# Altium PCB Copy of Receiver.PcbDoc (part 2 of 4)
Units mil, origin at the board's own origin, x right, y up, seen from the top; angles counter-clockwise.
Board outline 6370 x 5700 mil, 4 copper layers (Top Layer, GND, VCC, Bottom Layer), stack 23.756 mil thick; 302 components, 269 nets, 1182 pads, 304 vias.
Unrouted connection lines stored in the file: 1.
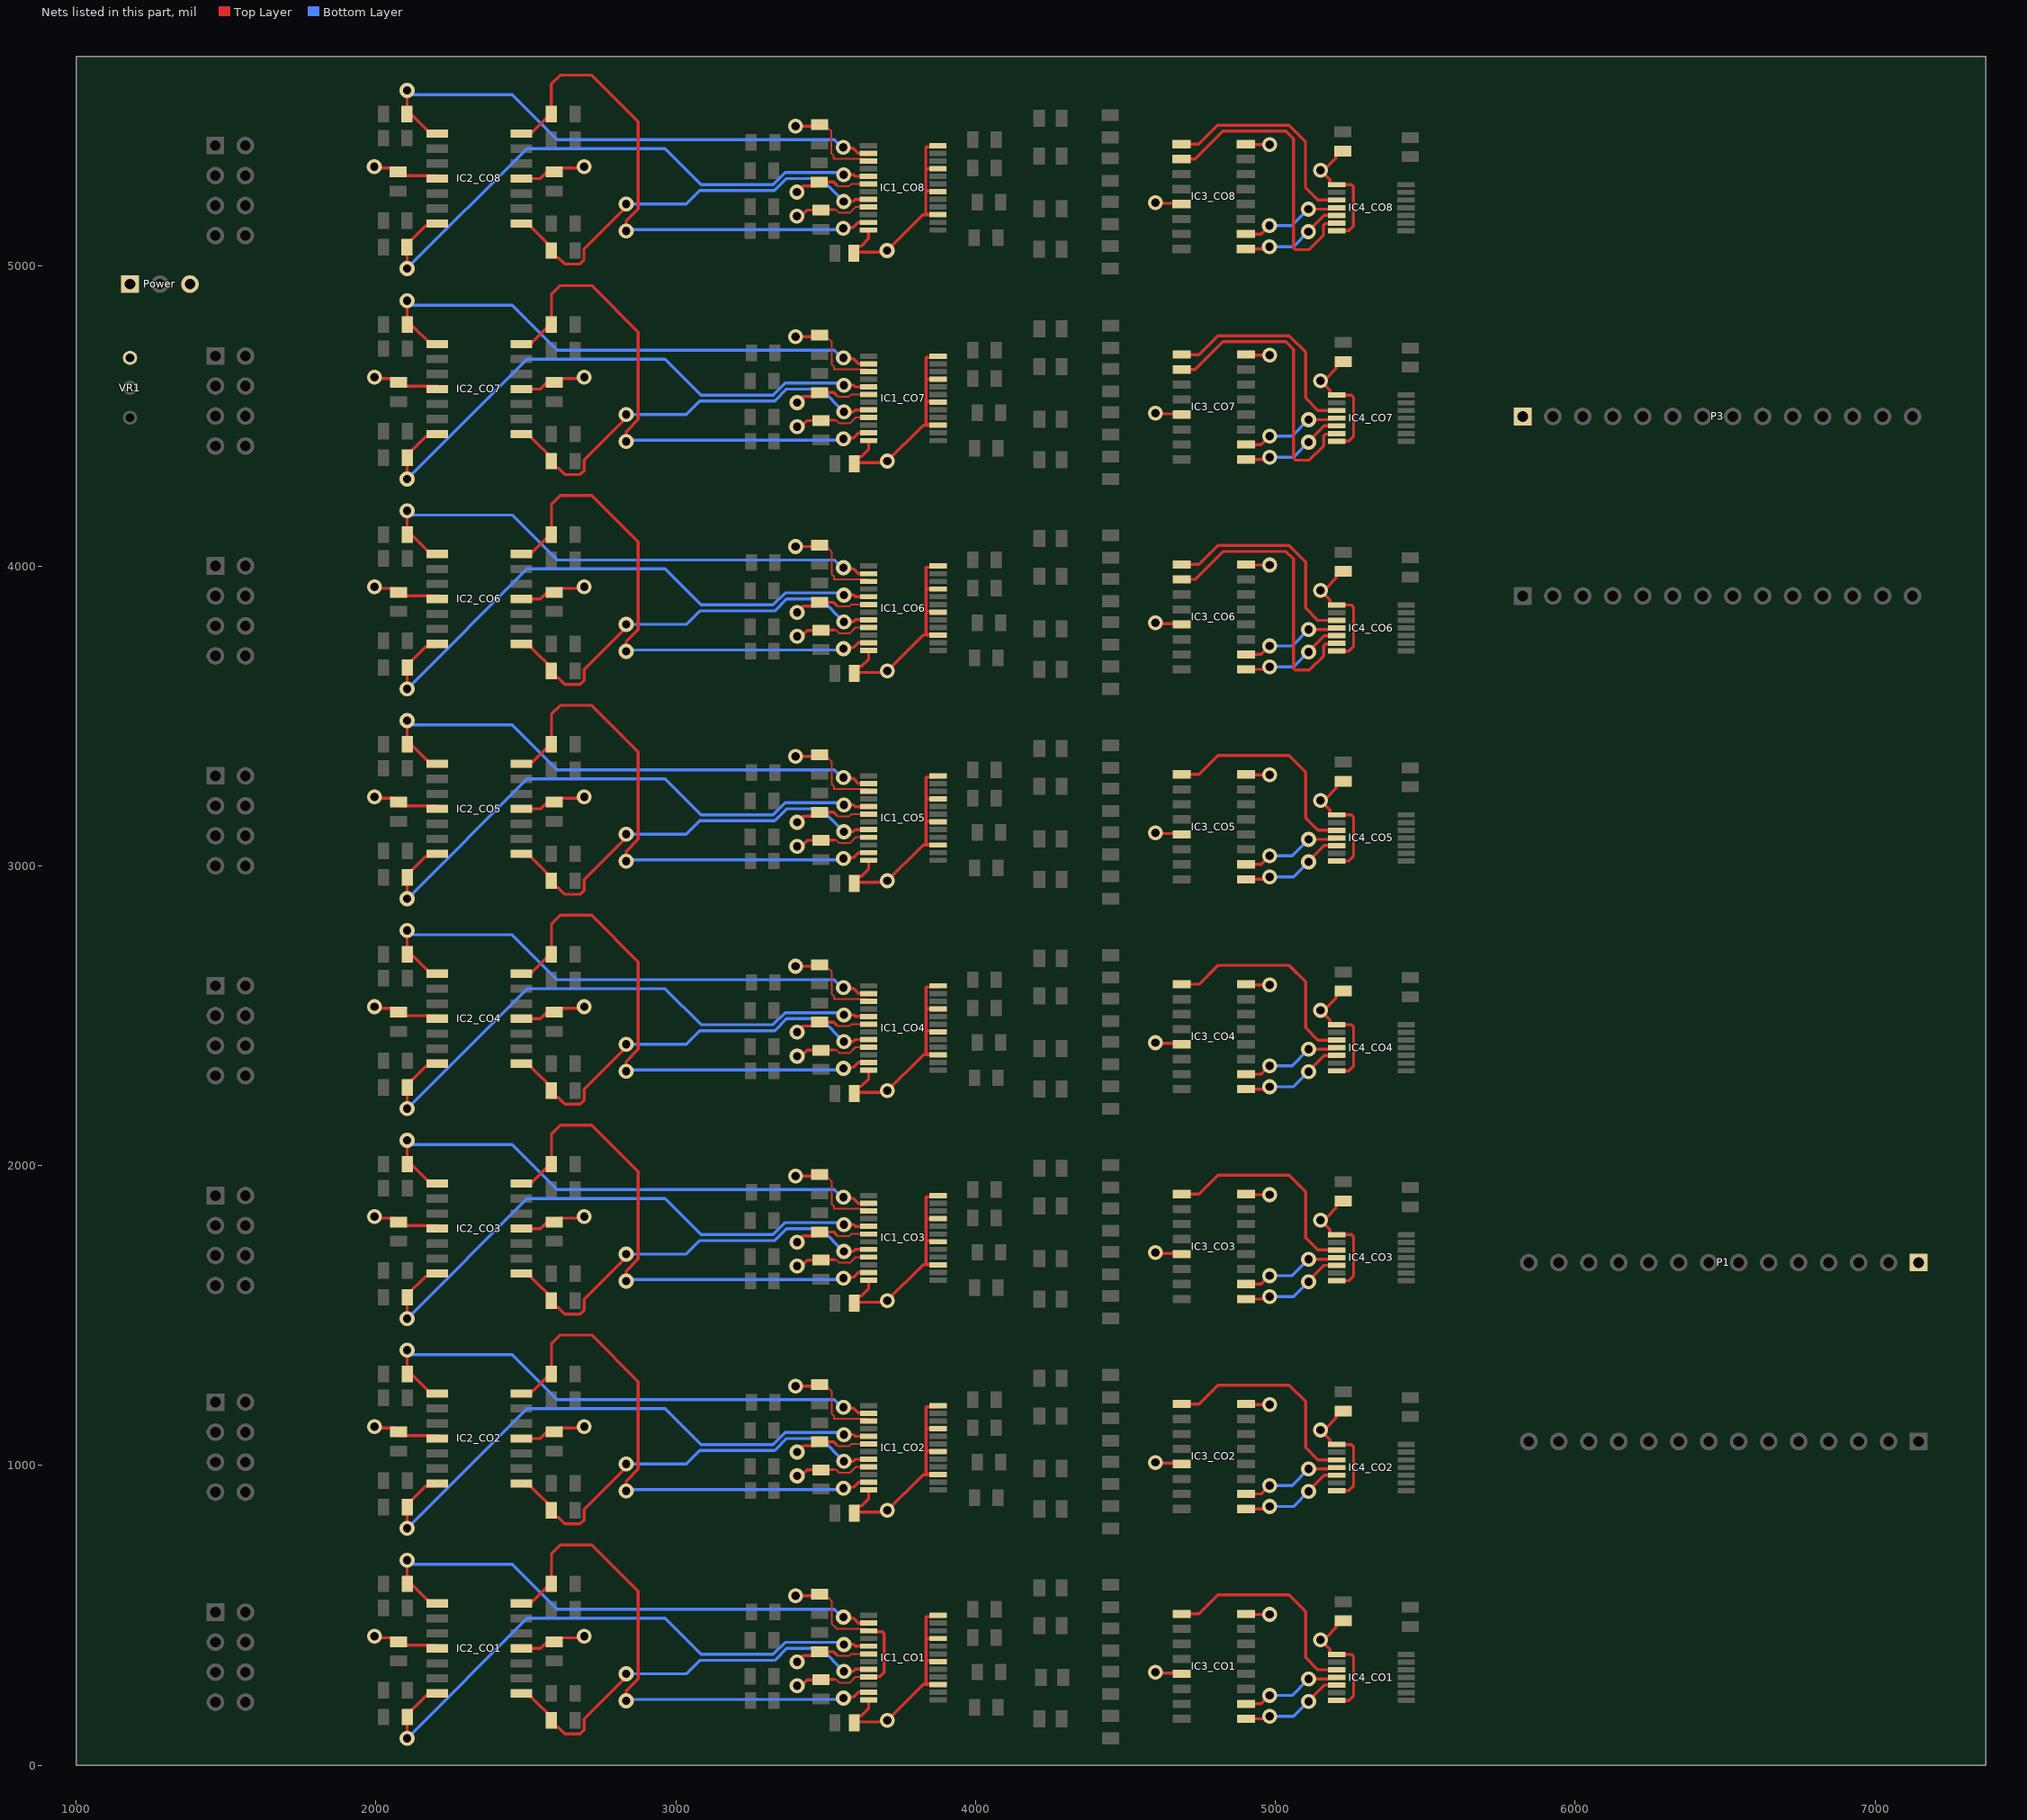
[diagram p4: the nets of this part, all layers, seen from the top]

## Via types
v1: diameter 50, hole 28, Top Layer to Bottom Layer, 304 vias

## Nets (pads, with @x,y where several pads share a name; then routed paths per layer and width w, separated by ;. In a path a pad name is that pad's centre, name@x,y a point inside that pad or via, vN(x,y) a via of type N, cw(c..) or ccw(c..) an arc to the next point about the centre after c; other vN are vias at no path point) (continued)
5VA_CO6: IC3_CO6.2 IC4_CO6.13 | length 988.8
  Top Layer w10: IC3_CO6.2@4687.59,3955 4732.4,3955 4825.43,4048.03 5035.43,4048.03 5060.43,4023.03 5060.43,3658.89 5066.29,3653.03 5113.46,3653.03 5160.43,3700 5160.43,3733.03 5167.45,3740.05 5202.97,3740.05 IC4_CO6.13@5204.76,3741.85
5VA_CO7: IC3_CO7.2 IC4_CO7.13 | length 988.8
  Top Layer w10: IC3_CO7.2@4687.59,4655 4732.4,4655 4825.43,4748.03 5035.43,4748.03 5060.43,4723.03 5060.43,4358.89 5066.29,4353.03 5113.46,4353.03 5160.43,4400 5160.43,4433.03 5167.45,4440.05 5202.97,4440.05 IC4_CO7.13@5204.76,4441.85
5VA_CO8: IC3_CO8.2 IC4_CO8.13 | length 988.8
  Top Layer w10: IC3_CO8.2@4687.16,5356.97 4731.97,5356.97 4825,5450 5035,5450 5060,5425 5060,5060.86 5065.86,5055 5113.03,5055 5160,5101.97 5160,5135 5167.02,5142.02 5202.53,5142.02 IC4_CO8.13@5204.33,5143.82
5VB_CO1: IC3_CO1.9 IC4_CO1.12 | length 350.3
  Top Layer w10: IC3_CO1.9@4902.16,155 4961.58,155 4969.61,163.03 v1(4980.43,163.03) ; v1(5110.43,213.03) 5110.43,215 5162.87,267.44 IC4_CO1.12@5204.76,267.44
  Bottom Layer w10: v1(4980.43,163.03) 5060.43,163.03 v1(5110.43,213.03)
5VB_CO2: IC3_CO2.9 IC4_CO2.12 | length 350.3
  Top Layer w10: IC3_CO2.9@4902.16,855 4961.58,855 4969.61,863.03 v1(4980.43,863.03) ; v1(5110.43,913.03) 5110.43,915 5162.87,967.44 IC4_CO2.12@5204.76,967.44
  Bottom Layer w10: v1(4980.43,863.03) 5060.43,863.03 v1(5110.43,913.03)
5VB_CO3: IC3_CO3.9 IC4_CO3.12 | length 350.3
  Top Layer w10: IC3_CO3.9@4902.16,1555 4961.58,1555 4969.61,1563.03 v1(4980.43,1563.03) ; v1(5110.43,1613.03) 5110.43,1615 5162.87,1667.44 IC4_CO3.12@5204.76,1667.44
  Bottom Layer w10: v1(4980.43,1563.03) 5060.43,1563.03 v1(5110.43,1613.03)
5VB_CO4: IC3_CO4.9 IC4_CO4.12 | length 350.3
  Top Layer w10: IC3_CO4.9@4902.16,2255 4961.58,2255 4969.61,2263.03 v1(4980.43,2263.03) ; v1(5110.43,2313.03) 5110.43,2315 5162.87,2367.44 IC4_CO4.12@5204.76,2367.44
  Bottom Layer w10: v1(4980.43,2263.03) 5060.43,2263.03 v1(5110.43,2313.03)
5VB_CO5: IC3_CO5.9 IC4_CO5.12 | length 350.3
  Top Layer w10: IC3_CO5.9@4902.16,2955 4961.58,2955 4969.61,2963.03 v1(4980.43,2963.03) ; v1(5110.43,3013.03) 5110.43,3015 5162.87,3067.44 IC4_CO5.12@5204.76,3067.44
  Bottom Layer w10: v1(4980.43,2963.03) 5060.43,2963.03 v1(5110.43,3013.03)
5VB_CO6: IC3_CO6.9 IC4_CO6.12 | length 350.3
  Top Layer w10: IC3_CO6.9@4902.16,3655 4961.58,3655 4969.61,3663.03 v1(4980.43,3663.03) ; v1(5110.43,3713.03) 5110.43,3715 5162.87,3767.44 IC4_CO6.12@5204.76,3767.44
  Bottom Layer w10: v1(4980.43,3663.03) 5060.43,3663.03 v1(5110.43,3713.03)
5VB_CO7: IC3_CO7.9 IC4_CO7.12 | length 350.3
  Top Layer w10: IC3_CO7.9@4902.16,4355 4961.58,4355 4969.61,4363.03 v1(4980.43,4363.03) ; v1(5110.43,4413.03) 5110.43,4415 5162.87,4467.44 IC4_CO7.12@5204.76,4467.44
  Bottom Layer w10: v1(4980.43,4363.03) 5060.43,4363.03 v1(5110.43,4413.03)
5VB_CO8: IC3_CO8.9 IC4_CO8.12 | length 350.3
  Top Layer w10: IC3_CO8.9@4901.72,5056.97 4961.15,5056.97 4969.18,5065 v1(4980,5065) ; v1(5110,5115) 5110,5116.97 5162.44,5169.41 IC4_CO8.12@5204.33,5169.41
  Bottom Layer w10: v1(4980,5065) 5060,5065 v1(5110,5115)
5VC_CO1: IC3_CO1.10 IC4_CO1.11 | length 339.1
  Top Layer w10: IC3_CO1.10@4902.16,205 4952.4,205 v1(4980.43,233.03) ; v1(5110.43,288.03) 5174.87,288.03 5176.01,289.17 5200.91,289.17 IC4_CO1.11@5204.76,293.03
  Bottom Layer w10: v1(4980.43,233.03) 5055.43,233.03 v1(5110.43,288.03)
5VC_CO2: IC3_CO2.10 IC4_CO2.11 | length 339.1
  Top Layer w10: IC3_CO2.10@4902.16,905 4952.4,905 v1(4980.43,933.03) ; v1(5110.43,988.03) 5174.87,988.03 5176.01,989.17 5200.91,989.17 IC4_CO2.11@5204.76,993.03
  Bottom Layer w10: v1(4980.43,933.03) 5055.43,933.03 v1(5110.43,988.03)
5VC_CO3: IC3_CO3.10 IC4_CO3.11 | length 339.1
  Top Layer w10: IC3_CO3.10@4902.16,1605 4952.4,1605 v1(4980.43,1633.03) ; v1(5110.43,1688.03) 5174.87,1688.03 5176.01,1689.17 5200.91,1689.17 IC4_CO3.11@5204.76,1693.03
  Bottom Layer w10: v1(4980.43,1633.03) 5055.43,1633.03 v1(5110.43,1688.03)
5VC_CO4: IC3_CO4.10 IC4_CO4.11 | length 339.1
  Top Layer w10: IC3_CO4.10@4902.16,2305 4952.4,2305 v1(4980.43,2333.03) ; v1(5110.43,2388.03) 5174.87,2388.03 5176.01,2389.17 5200.91,2389.17 IC4_CO4.11@5204.76,2393.03
  Bottom Layer w10: v1(4980.43,2333.03) 5055.43,2333.03 v1(5110.43,2388.03)
5VC_CO5: IC3_CO5.10 IC4_CO5.11 | length 339.1
  Top Layer w10: IC3_CO5.10@4902.16,3005 4952.4,3005 v1(4980.43,3033.03) ; v1(5110.43,3088.03) 5174.87,3088.03 5176.01,3089.17 5200.91,3089.17 IC4_CO5.11@5204.76,3093.03
  Bottom Layer w10: v1(4980.43,3033.03) 5055.43,3033.03 v1(5110.43,3088.03)
5VC_CO6: IC3_CO6.10 IC4_CO6.11 | length 339.1
  Top Layer w10: IC3_CO6.10@4902.16,3705 4952.4,3705 v1(4980.43,3733.03) ; v1(5110.43,3788.03) 5174.87,3788.03 5176.01,3789.17 5200.91,3789.17 IC4_CO6.11@5204.76,3793.03
  Bottom Layer w10: v1(4980.43,3733.03) 5055.43,3733.03 v1(5110.43,3788.03)
5VC_CO7: IC3_CO7.10 IC4_CO7.11 | length 339.1
  Top Layer w10: IC3_CO7.10@4902.16,4405 4952.4,4405 v1(4980.43,4433.03) ; v1(5110.43,4488.03) 5174.87,4488.03 5176.01,4489.17 5200.91,4489.17 IC4_CO7.11@5204.76,4493.03
  Bottom Layer w10: v1(4980.43,4433.03) 5055.43,4433.03 v1(5110.43,4488.03)
5VC_CO8: IC3_CO8.10 IC4_CO8.11 | length 339.1
  Top Layer w10: IC3_CO8.10@4901.72,5106.97 4951.97,5106.97 v1(4980,5135) ; v1(5110,5190) 5174.44,5190 5175.58,5191.14 5200.47,5191.14 IC4_CO8.11@5204.33,5195
  Bottom Layer w10: v1(4980,5135) 5055,5135 v1(5110,5190)
5VD_CO1: IC3_CO1.1 IC4_CO1.10 | length 736.2
  Top Layer w10: IC3_CO1.1@4687.59,505 4744.68,505 4807.71,568.03 5045.43,568.03 5100.43,513.03 5100.43,360 5141.81,318.62 IC4_CO1.10@5204.76,318.62
5VD_CO2: IC3_CO2.1 IC4_CO2.10 | length 736.2
  Top Layer w10: IC3_CO2.1@4687.59,1205 4744.68,1205 4807.71,1268.03 5045.43,1268.03 5100.43,1213.03 5100.43,1060 5141.81,1018.62 IC4_CO2.10@5204.76,1018.62
5VD_CO3: IC3_CO3.1 IC4_CO3.10 | length 736.2
  Top Layer w10: IC3_CO3.1@4687.59,1905 4744.68,1905 4807.71,1968.03 5045.43,1968.03 5100.43,1913.03 5100.43,1760 5141.81,1718.62 IC4_CO3.10@5204.76,1718.62
5VD_CO4: IC3_CO4.1 IC4_CO4.10 | length 736.2
  Top Layer w10: IC3_CO4.1@4687.59,2605 4744.68,2605 4807.71,2668.03 5045.43,2668.03 5100.43,2613.03 5100.43,2460 5141.81,2418.62 IC4_CO4.10@5204.76,2418.62
5VD_CO5: IC3_CO5.1 IC4_CO5.10 | length 736.2
  Top Layer w10: IC3_CO5.1@4687.59,3305 4744.68,3305 4807.71,3368.03 5045.43,3368.03 5100.43,3313.03 5100.43,3160 5141.81,3118.62 IC4_CO5.10@5204.76,3118.62
5VD_CO6: IC3_CO6.1 IC4_CO6.10 | length 736.2
  Top Layer w10: IC3_CO6.1@4687.59,4005 4744.68,4005 4807.71,4068.03 5045.43,4068.03 5100.43,4013.03 5100.43,3860 5141.81,3818.62 IC4_CO6.10@5204.76,3818.62
5VD_CO7: IC3_CO7.1 IC4_CO7.10 | length 736.2
  Top Layer w10: IC3_CO7.1@4687.59,4705 4744.68,4705 4807.71,4768.03 5045.43,4768.03 5100.43,4713.03 5100.43,4560 5141.81,4518.62 IC4_CO7.10@5204.76,4518.62
5VD_CO8: IC3_CO8.1 IC4_CO8.10 | length 736.2
  Top Layer w10: IC3_CO8.1@4687.16,5406.97 4744.25,5406.97 4807.28,5470 5045,5470 5100,5415 5100,5261.97 5141.38,5220.59 IC4_CO8.10@5204.33,5220.59
+5: C1_CO1.2 C1_CO2.2 C1_CO3.2 C1_CO4.2 C1_CO5.2 C1_CO6.2 C1_CO7.2 C1_CO8.2 C3_CO1.2 C3_CO2.2 C3_CO3.2 C3_CO4.2 C3_CO5.2 C3_CO6.2 C3_CO7.2 C3_CO8.2 C5_CO1.1 C5_CO2.1 C5_CO3.1 C5_CO4.1 C5_CO5.1 C5_CO6.1 C5_CO7.1 C5_CO8.1 C8_CO1.1 C8_CO2.1 C8_CO3.1 C8_CO4.1 C8_CO5.1 C8_CO6.1 C8_CO7.1 C8_CO8.1 IC1_CO1.6 IC1_CO1.12 IC1_CO1.15 IC1_CO1.18 IC1_CO1.21 IC1_CO1.24 IC1_CO2.6 IC1_CO2.12 IC1_CO2.15 IC1_CO2.18 IC1_CO2.21 IC1_CO2.24 IC1_CO3.6 IC1_CO3.12 IC1_CO3.15 IC1_CO3.18 IC1_CO3.21 IC1_CO3.24 IC1_CO4.6 IC1_CO4.12 IC1_CO4.15 IC1_CO4.18 IC1_CO4.21 IC1_CO4.24 IC1_CO5.6 IC1_CO5.12 IC1_CO5.15 IC1_CO5.18 IC1_CO5.21 IC1_CO5.24 IC1_CO6.6 IC1_CO6.12 IC1_CO6.15 IC1_CO6.18 IC1_CO6.21 IC1_CO6.24 IC1_CO7.6 IC1_CO7.12 IC1_CO7.15 IC1_CO7.18 IC1_CO7.21 IC1_CO7.24 IC1_CO8.6 IC1_CO8.12 IC1_CO8.15 IC1_CO8.18 IC1_CO8.21 IC1_CO8.24 IC2_CO1.4 IC2_CO2.4 IC2_CO3.4 IC2_CO4.4 IC2_CO5.4 IC2_CO6.4 IC2_CO7.4 IC2_CO8.4 IC3_CO1.5 IC3_CO1.16 IC3_CO2.5 IC3_CO2.16 IC3_CO3.5 IC3_CO3.16 IC3_CO4.5 IC3_CO4.16 IC3_CO5.5 IC3_CO5.16 IC3_CO6.5 IC3_CO6.16 IC3_CO7.5 IC3_CO7.16 IC3_CO8.5 IC3_CO8.16 IC4_CO1.8 IC4_CO1.14 IC4_CO2.8 IC4_CO2.14 IC4_CO3.8 IC4_CO3.14 IC4_CO4.8 IC4_CO4.14 IC4_CO5.8 IC4_CO5.14 IC4_CO6.8 IC4_CO6.14 IC4_CO7.8 IC4_CO7.14 IC4_CO8.8 IC4_CO8.14 P1.1 P3.1 Power.1 VR1.3 | length 15560.8
  Top Layer w6: 3536.09,5270.96 3540.33,5266.72 3578.13,5266.72 3585.13,5273.72 IC1_CO8.6@3643.1,5273.72 ; 3536.52,368.99 3540.76,364.75 3578.56,364.75 3585.56,371.75 IC1_CO1.6@3643.54,371.75 ; 3536.52,1068.99 3540.76,1064.75 3578.56,1064.75 3585.56,1071.75 IC1_CO2.6@3643.54,1071.75 ; 3536.52,1768.99 3540.76,1764.75 3578.56,1764.75 3585.56,1771.75 IC1_CO3.6@3643.54,1771.75 ; 3536.52,2468.99 3540.76,2464.75 3578.56,2464.75 3585.56,2471.75 IC1_CO4.6@3643.54,2471.75 ; 3536.52,3168.99 3540.76,3164.75 3578.56,3164.75 3585.56,3171.75 IC1_CO5.6@3643.54,3171.75 ; 3536.52,3868.99 3540.76,3864.75 3578.56,3864.75 3585.56,3871.75 IC1_CO6.6@3643.54,3871.75 ; 3536.52,4568.99 3540.76,4564.75 3578.56,4564.75 3585.56,4571.75 IC1_CO7.6@3643.54,4571.75
  Top Layer w10: v1(1994.57,5331.97) 1999.57,5326.97 2061.57,5326.97 C5_CO8.1@2074.57,5313.97 ; v1(1995,430) 2000,425 2062,425 C5_CO1.1@2075,412 ; v1(1995,1130) 2000,1125 2062,1125 C5_CO2.1@2075,1112 ; v1(1995,1830) 2000,1825 2062,1825 C5_CO3.1@2075,1812 ; v1(1995,2530) 2000,2525 2062,2525 C5_CO4.1@2075,2512 ; v1(1995,3230) 2000,3225 2062,3225 C5_CO5.1@2075,3212 ; v1(1995,3930) 2000,3925 2062,3925 C5_CO6.1@2075,3912 ; v1(1995,4630) 2000,4625 2062,4625 C5_CO7.1@2075,4612 ; C5_CO8.1@2077.37,5302.37 C5_CO8.1@2078.97,5303.97 ; C5_CO1.1@2077.8,400.4 C5_CO1.1@2079.4,402 ; C5_CO2.1@2077.8,1100.4 C5_CO2.1@2079.4,1102 ; C5_CO3.1@2077.8,1800.4 C5_CO3.1@2079.4,1802 ; C5_CO4.1@2077.8,2500.4 C5_CO4.1@2079.4,2502 ; C5_CO5.1@2077.8,3200.4 C5_CO5.1@2079.4,3202 ; C5_CO6.1@2077.8,3900.4 C5_CO6.1@2079.4,3902 ; C5_CO7.1@2077.8,4600.4 C5_CO7.1@2079.4,4602 ; C5_CO8.1@2078.97,5301.97 IC2_CO8.4@2204.57,5301.97 ; C5_CO1.1@2079.4,400 IC2_CO1.4@2205,400 ; C5_CO2.1@2079.4,1100 IC2_CO2.4@2205,1100 ; C5_CO3.1@2079.4,1800 IC2_CO3.4@2205,1800 ; C5_CO4.1@2079.4,2500 IC2_CO4.4@2205,2500 ; C5_CO5.1@2079.4,3200 IC2_CO5.4@2205,3200 ; C5_CO6.1@2079.4,3900 IC2_CO6.4@2205,3900 ; C5_CO7.1@2079.4,4600 IC2_CO7.4@2205,4600 ; v1(3404.57,5246.97) 3425.13,5267.54 3465.77,5267.54 C1_CO8.2@3478.77,5280.54 3526.51,5280.54 3536.09,5270.96 ; v1(3405,345) 3425.57,365.57 3466.2,365.57 C1_CO1.2@3479.2,378.57 3526.95,378.57 3536.52,368.99 ; v1(3405,1045) 3425.57,1065.57 3466.2,1065.57 C1_CO2.2@3479.2,1078.57 3526.95,1078.57 3536.52,1068.99 ; v1(3405,1745) 3425.57,1765.57 3466.2,1765.57 C1_CO3.2@3479.2,1778.57 3526.95,1778.57 3536.52,1768.99 ; v1(3405,2445) 3425.57,2465.57 3466.2,2465.57 C1_CO4.2@3479.2,2478.57 3526.95,2478.57 3536.52,2468.99 ; v1(3405,3145) 3425.57,3165.57 3466.2,3165.57 C1_CO5.2@3479.2,3178.57 3526.95,3178.57 3536.52,3168.99 ; v1(3405,3845) 3425.57,3865.57 3466.2,3865.57 C1_CO6.2@3479.2,3878.57 3526.95,3878.57 3536.52,3868.99 ; v1(3405,4545) 3425.57,4565.57 3466.2,4565.57 C1_CO7.2@3479.2,4578.57 3526.95,4578.57 3536.52,4568.99 ; IC1_CO8.12@3643.1,5120.18 3643.1,5091.62 3617.94,5066.46 3607.44,5066.46 3594.44,5053.46 C3_CO8.2@3594.44,5042.96 3597.94,5046.46 3699.63,5046.46 3824.53,5171.36 IC1_CO8.15@3874.44,5171.36 3872.11,5173.69 3837.66,5173.69 3834.13,5177.21 3834.13,5254.72 ; IC1_CO1.12@3643.54,218.21 3643.54,189.65 3618.37,164.49 3607.87,164.49 3594.87,151.49 C3_CO1.2@3594.87,140.99 3598.37,144.49 3700.07,144.49 3824.96,269.39 IC1_CO1.15@3874.87,269.39 3872.54,271.72 3838.1,271.72 3834.57,275.24 3834.57,352.75 ; IC1_CO2.12@3643.54,918.21 3643.54,889.65 3618.37,864.49 3607.87,864.49 3594.87,851.49 C3_CO2.2@3594.87,840.99 3598.37,844.49 3700.07,844.49 3824.96,969.39 IC1_CO2.15@3874.87,969.39 3872.54,971.72 3838.1,971.72 3834.57,975.24 3834.57,1052.75 ; IC1_CO3.12@3643.54,1618.2 3643.54,1589.65 3618.37,1564.49 3607.87,1564.49 3594.87,1551.49 C3_CO3.2@3594.87,1540.99 3598.37,1544.49 3700.07,1544.49 3824.96,1669.39 IC1_CO3.15@3874.87,1669.39 3872.54,1671.72 3838.1,1671.72 3834.57,1675.24 3834.57,1752.75 ; IC1_CO4.12@3643.54,2318.2 3643.54,2289.65 3618.37,2264.49 3607.87,2264.49 3594.87,2251.49 C3_CO4.2@3594.87,2240.99 3598.37,2244.49 3700.07,2244.49 3824.96,2369.39 IC1_CO4.15@3874.87,2369.39 3872.54,2371.72 3838.1,2371.72 3834.57,2375.24 3834.57,2452.75 ; IC1_CO5.12@3643.54,3018.2 3643.54,2989.65 3618.37,2964.49 3607.87,2964.49 3594.87,2951.49 C3_CO5.2@3594.87,2940.99 3598.37,2944.49 3700.07,2944.49 3824.96,3069.39 IC1_CO5.15@3874.87,3069.39 3872.54,3071.72 3838.1,3071.72 3834.57,3075.24 3834.57,3152.75 ; IC1_CO6.12@3643.54,3718.2 3643.54,3689.65 3618.37,3664.49 3607.87,3664.49 3594.87,3651.49 C3_CO6.2@3594.87,3640.99 3598.37,3644.49 3700.07,3644.49 3824.96,3769.39 IC1_CO6.15@3874.87,3769.39 3872.54,3771.72 3838.1,3771.72 3834.57,3775.24 3834.57,3852.75 ; IC1_CO7.12@3643.54,4418.2 3643.54,4389.65 3618.37,4364.49 3607.87,4364.49 3594.87,4351.49 C3_CO7.2@3594.87,4340.99 3598.37,4344.49 3700.07,4344.49 3824.96,4469.39 IC1_CO7.15@3874.87,4469.39 3872.54,4471.72 3838.1,4471.72 3834.57,4475.24 3834.57,4552.75 ; IC1_CO8.18@3874.44,5248.13 3871.75,5250.82 3838.03,5250.82 3834.13,5254.72 ; IC1_CO8.21@3874.44,5324.9 3839.99,5324.9 3834.13,5319.04 ; IC1_CO8.24@3874.44,5401.67 3870.58,5397.81 3835.42,5397.81 3834.13,5396.52 3834.13,5319.04 ; IC1_CO1.18@3874.87,346.16 3872.18,348.85 3838.46,348.85 3834.57,352.75 ; IC1_CO1.21@3874.87,422.93 3840.43,422.93 3834.57,417.07 ; IC1_CO1.24@3874.87,499.7 3871.02,495.84 3835.86,495.84 3834.57,494.55 3834.57,417.07 ; IC1_CO2.18@3874.87,1046.16 3872.18,1048.85 3838.46,1048.85 3834.57,1052.75 ; IC1_CO2.21@3874.87,1122.93 3840.43,1122.93 3834.57,1117.07 ; IC1_CO2.24@3874.87,1199.7 3871.02,1195.84 3835.86,1195.84 3834.57,1194.55 3834.57,1117.07 ; IC1_CO3.18@3874.87,1746.16 3872.18,1748.85 3838.46,1748.85 3834.57,1752.75 ; IC1_CO3.21@3874.87,1822.93 3840.43,1822.93 3834.57,1817.07 ; IC1_CO3.24@3874.87,1899.7 3871.02,1895.84 3835.86,1895.84 3834.57,1894.55 3834.57,1817.07 ; IC1_CO4.18@3874.87,2446.16 3872.18,2448.85 3838.46,2448.85 3834.57,2452.75 ; IC1_CO4.21@3874.87,2522.93 3840.43,2522.93 3834.57,2517.07 ; IC1_CO4.24@3874.87,2599.7 3871.02,2595.84 3835.86,2595.84 3834.57,2594.55 3834.57,2517.07 ; IC1_CO5.18@3874.87,3146.16 3872.18,3148.85 3838.46,3148.85 3834.57,3152.75 ; IC1_CO5.21@3874.87,3222.93 3840.43,3222.93 3834.57,3217.07 ; IC1_CO5.24@3874.87,3299.7 3871.02,3295.84 3835.86,3295.84 3834.57,3294.55 3834.57,3217.07 ; IC1_CO6.18@3874.87,3846.16 3872.18,3848.85 3838.46,3848.85 3834.57,3852.75 ; IC1_CO6.21@3874.87,3922.93 3840.43,3922.93 3834.57,3917.07 ; IC1_CO6.24@3874.87,3999.7 3871.02,3995.84 3835.86,3995.84 3834.57,3994.55 3834.57,3917.07 ; IC1_CO7.18@3874.87,4546.16 3872.18,4548.85 3838.46,4548.85 3834.57,4552.75 ; IC1_CO7.21@3874.87,4622.93 3840.43,4622.93 3834.57,4617.07 ; IC1_CO7.24@3874.87,4699.7 3871.02,4695.84 3835.86,4695.84 3834.57,4694.55 3834.57,4617.07 ; v1(4599.57,5211.97) 4602.07,5209.47 4684.66,5209.47 IC3_CO8.5@4687.16,5206.97 IC3_CO8.5@4704.57,5206.97 ; v1(4600,310) 4602.5,307.5 4685.09,307.5 IC3_CO1.5@4687.59,305 IC3_CO1.5@4705,305 ; v1(4600,1010) 4602.5,1007.5 4685.09,1007.5 IC3_CO2.5@4687.59,1005 IC3_CO2.5@4705,1005 ; v1(4600,1710) 4602.5,1707.5 4685.09,1707.5 IC3_CO3.5@4687.59,1705 IC3_CO3.5@4705,1705 ; v1(4600,2410) 4602.5,2407.5 4685.09,2407.5 IC3_CO4.5@4687.59,2405 IC3_CO4.5@4705,2405 ; v1(4600,3110) 4602.5,3107.5 4685.09,3107.5 IC3_CO5.5@4687.59,3105 IC3_CO5.5@4705,3105 ; v1(4600,3810) 4602.5,3807.5 4685.09,3807.5 IC3_CO6.5@4687.59,3805 IC3_CO6.5@4705,3805 ; v1(4600,4510) 4602.5,4507.5 4685.09,4507.5 IC3_CO7.5@4687.59,4505 IC3_CO7.5@4705,4505 ; IC3_CO8.16@4901.72,5406.97 4907.5,5406.97 4916.28,5415.75 4916.28,5405 v1(4980.63,5405) ; IC3_CO1.16@4902.16,505 4907.94,505 4916.72,513.78 4916.72,503.03 v1(4981.06,503.03) ; IC3_CO2.16@4902.16,1205 4907.94,1205 4916.72,1213.78 4916.72,1203.03 v1(4981.06,1203.03) ; IC3_CO3.16@4902.16,1905 4907.94,1905 4916.72,1913.78 4916.72,1903.03 v1(4981.06,1903.03) ; IC3_CO4.16@4902.16,2605 4907.94,2605 4916.72,2613.78 4916.72,2603.03 v1(4981.06,2603.03) ; IC3_CO5.16@4902.16,3305 4907.94,3305 4916.72,3313.78 4916.72,3303.03 v1(4981.06,3303.03) ; IC3_CO6.16@4902.16,4005 4907.94,4005 4916.72,4013.78 4916.72,4003.03 v1(4981.06,4003.03) ; IC3_CO7.16@4902.16,4705 4907.94,4705 4916.72,4713.78 4916.72,4703.03 v1(4981.06,4703.03) ; IC4_CO8.14@5204.33,5118.23 5245,5118.23 5260,5133.23 5260,5265 5253.23,5271.77 IC4_CO8.8@5204.33,5271.77 5185.58,5271.77 5181.73,5275.63 5181.73,5288.27 v1(5150,5320) 5157.65,5327.65 5168.9,5327.65 5201.5,5360.25 5201.5,5370.75 5214.5,5383.75 C8_CO8.1@5225,5383.75 ; IC4_CO1.14@5204.76,216.26 5245.43,216.26 5260.43,231.26 5260.43,363.03 5253.66,369.8 IC4_CO1.8@5204.76,369.8 5186.02,369.8 5182.16,373.66 5182.16,386.3 v1(5150.43,418.03) 5158.09,425.68 5169.34,425.68 5201.93,458.28 5201.93,468.78 5214.93,481.78 C8_CO1.1@5225.43,481.78 ; IC4_CO2.14@5204.76,916.26 5245.43,916.26 5260.43,931.26 5260.43,1063.03 5253.66,1069.8 IC4_CO2.8@5204.76,1069.8 5186.02,1069.8 5182.16,1073.66 5182.16,1086.3 v1(5150.43,1118.03) 5158.09,1125.68 5169.34,1125.68 5201.93,1158.28 5201.93,1168.78 5214.93,1181.78 C8_CO2.1@5225.43,1181.78 ; IC4_CO3.14@5204.76,1616.26 5245.43,1616.26 5260.43,1631.26 5260.43,1763.03 5253.66,1769.8 IC4_CO3.8@5204.76,1769.8 5186.02,1769.8 5182.16,1773.66 5182.16,1786.3 v1(5150.43,1818.03) 5158.09,1825.68 5169.34,1825.68 5201.93,1858.28 5201.93,1868.78 5214.93,1881.78 C8_CO3.1@5225.43,1881.78 ; IC4_CO4.14@5204.76,2316.26 5245.43,2316.26 5260.43,2331.26 5260.43,2463.03 5253.66,2469.8 IC4_CO4.8@5204.76,2469.8 5186.02,2469.8 5182.16,2473.66 5182.16,2486.3 v1(5150.43,2518.03) 5158.09,2525.68 5169.34,2525.68 5201.93,2558.28 5201.93,2568.78 5214.93,2581.78 C8_CO4.1@5225.43,2581.78 ; IC4_CO5.14@5204.76,3016.26 5245.43,3016.26 5260.43,3031.26 5260.43,3163.03 5253.66,3169.8 IC4_CO5.8@5204.76,3169.8 5186.02,3169.8 5182.16,3173.66 5182.16,3186.3 v1(5150.43,3218.03) 5158.09,3225.68 5169.34,3225.68 5201.93,3258.28 5201.93,3268.78 5214.93,3281.78 C8_CO5.1@5225.43,3281.78 ; IC4_CO6.14@5204.76,3716.26 5245.43,3716.26 5260.43,3731.26 5260.43,3863.03 5253.66,3869.8 IC4_CO6.8@5204.76,3869.8 5186.02,3869.8 5182.16,3873.66 5182.16,3886.3 v1(5150.43,3918.03) 5158.09,3925.68 5169.34,3925.68 5201.93,3958.28 5201.93,3968.78 5214.93,3981.78 C8_CO6.1@5225.43,3981.78 ; IC4_CO7.14@5204.76,4416.26 5245.43,4416.26 5260.43,4431.26 5260.43,4563.03 5253.66,4569.8 IC4_CO7.8@5204.76,4569.8 5186.02,4569.8 5182.16,4573.66 5182.16,4586.3 v1(5150.43,4618.03) 5158.09,4625.68 5169.34,4625.68 5201.93,4658.28 5201.93,4668.78 5214.93,4681.78 C8_CO7.1@5225.43,4681.78 ; 3834.13,5254.72 3834.13,5319.04 ; 3834.57,352.75 3834.57,417.07 ; 3834.57,1052.75 3834.57,1117.07 ; 3834.57,1752.75 3834.57,1817.07 ; 3834.57,2452.75 3834.57,2517.07 ; 3834.57,3152.75 3834.57,3217.07 ; 3834.57,3852.75 3834.57,3917.07 ; 3834.57,4552.75 3834.57,4617.07
  other v1: 3705.58,150 3705.58,850 3705.58,1550 3705.58,2250 3705.58,2950 3705.58,3650 3705.58,4350 3705.14,5051.97
-5: C2_CO1.2 C2_CO2.2 C2_CO3.2 C2_CO4.2 C2_CO5.2 C2_CO6.2 C2_CO7.2 C2_CO8.2 C4_CO1.2 C4_CO2.2 C4_CO3.2 C4_CO4.2 C4_CO5.2 C4_CO6.2 C4_CO7.2 C4_CO8.2 C6_CO1.1 C6_CO2.1 C6_CO3.1 C6_CO4.1 C6_CO5.1 C6_CO6.1 C6_CO7.1 C6_CO8.1 IC1_CO1.3 IC1_CO1.9 IC1_CO2.3 IC1_CO2.9 IC1_CO3.3 IC1_CO3.9 IC1_CO4.3 IC1_CO4.9 IC1_CO5.3 IC1_CO5.9 IC1_CO6.3 IC1_CO6.9 IC1_CO7.3 IC1_CO7.9 IC1_CO8.3 IC1_CO8.9 IC2_CO1.11 IC2_CO2.11 IC2_CO3.11 IC2_CO4.11 IC2_CO5.11 IC2_CO6.11 IC2_CO7.11 IC2_CO8.11 Power.3 | length 6899.2
  Top Layer w6: C2_CO8.2@3494.08,5474.96 3494.08,5466.48 3499.69,5460.86 3508.18,5460.86 3519.57,5449.47 3519.57,5374.66 3526.77,5367.45 3526.77,5358.06 ; C2_CO1.2@3494.51,572.99 3494.51,564.51 3500.12,558.89 3508.61,558.89 3520,547.5 3520,472.69 3536.94,455.75 3636.31,455.75 IC1_CO1.3@3643.54,448.52 ; C2_CO2.2@3494.51,1272.99 3494.51,1264.51 3500.12,1258.89 3508.61,1258.89 3520,1247.5 3520,1172.69 3527.2,1165.48 3527.2,1156.09 ; C2_CO3.2@3494.51,1972.99 3494.51,1964.51 3500.12,1958.89 3508.61,1958.89 3520,1947.5 3520,1872.69 3527.2,1865.48 3527.2,1856.09 ; C2_CO4.2@3494.51,2672.99 3494.51,2664.51 3500.12,2658.89 3508.61,2658.89 3520,2647.5 3520,2572.69 3527.2,2565.48 3527.2,2556.09 ; C2_CO5.2@3494.51,3372.99 3494.51,3364.51 3500.12,3358.89 3508.61,3358.89 3520,3347.5 3520,3272.69 3527.2,3265.48 3527.2,3256.09 ; C2_CO6.2@3494.51,4072.99 3494.51,4064.51 3500.12,4058.89 3508.61,4058.89 3520,4047.5 3520,3972.69 3527.2,3965.48 3527.2,3956.09 ; C2_CO7.2@3494.51,4772.99 3494.51,4764.51 3500.12,4758.89 3508.61,4758.89 3520,4747.5 3520,4672.69 3527.2,4665.48 3527.2,4656.09 ; 3526.77,5188.2 3534.07,5188.2 3544.59,5177.68 3580.25,5177.68 3599.52,5196.95 IC1_CO8.9@3643.1,5196.95 ; 3526.77,5357.72 3526.77,5358.06 ; 3527.2,286.23 3534.5,286.23 3545.02,275.71 3580.69,275.71 3599.95,294.98 IC1_CO1.9@3643.54,294.98 ; 3527.2,986.23 3534.5,986.23 3545.02,975.71 3580.69,975.71 3599.95,994.98 IC1_CO2.9@3643.54,994.98 ; 3527.2,1155.75 3527.2,1156.09 ; 3527.2,1686.23 3534.5,1686.23 3545.02,1675.71 3580.69,1675.71 3599.95,1694.98 IC1_CO3.9@3643.54,1694.98 ; 3527.2,1855.75 3527.2,1856.09 ; 3527.2,2386.23 3534.5,2386.23 3545.02,2375.71 3580.69,2375.71 3599.95,2394.98 IC1_CO4.9@3643.54,2394.98 ; 3527.2,2555.75 3527.2,2556.09 ; 3527.2,3086.23 3534.5,3086.23 3545.02,3075.71 3580.69,3075.71 3599.95,3094.98 IC1_CO5.9@3643.54,3094.98 ; 3527.2,3255.75 3527.2,3256.09 ; 3527.2,3786.23 3534.5,3786.23 3545.02,3775.71 3580.69,3775.71 3599.95,3794.98 IC1_CO6.9@3643.54,3794.98 ; 3527.2,3955.75 3527.2,3956.09 ; 3527.2,4486.23 3534.5,4486.23 3545.02,4475.71 3580.69,4475.71 3599.95,4494.98 IC1_CO7.9@3643.54,4494.98 ; 3527.2,4655.75 3527.2,4656.09 ; IC1_CO8.3@3643.1,5350.49 3635.87,5357.72 3527.12,5357.72 3526.77,5358.06 ; IC1_CO2.3@3643.54,1148.52 3636.31,1155.75 3527.55,1155.75 3527.2,1156.09 ; IC1_CO3.3@3643.54,1848.52 3636.31,1855.75 3527.55,1855.75 3527.2,1856.09 ; IC1_CO4.3@3643.54,2548.52 3636.31,2555.75 3527.55,2555.75 3527.2,2556.09 ; IC1_CO5.3@3643.54,3248.52 3636.31,3255.75 3527.55,3255.75 3527.2,3256.09 ; IC1_CO6.3@3643.54,3948.52 3636.31,3955.75 3527.55,3955.75 3527.2,3956.09 ; IC1_CO7.3@3643.54,4648.52 3636.31,4655.75 3527.55,4655.75 3527.2,4656.09
  Top Layer w10: IC2_CO8.11@2485.04,5291.97 2549,5291.97 2568.52,5311.49 C6_CO8.1@2597.04,5311.49 ; IC2_CO1.11@2485.47,390 2549.43,390 2568.96,409.52 C6_CO1.1@2597.48,409.52 ; IC2_CO2.11@2485.47,1090 2549.43,1090 2568.96,1109.52 C6_CO2.1@2597.48,1109.52 ; IC2_CO3.11@2485.47,1790 2549.43,1790 2568.96,1809.52 C6_CO3.1@2597.48,1809.52 ; IC2_CO4.11@2485.47,2490 2549.43,2490 2568.96,2509.52 C6_CO4.1@2597.48,2509.52 ; IC2_CO5.11@2485.47,3190 2549.43,3190 2568.96,3209.52 C6_CO5.1@2597.48,3209.52 ; IC2_CO6.11@2485.47,3890 2549.43,3890 2568.96,3909.52 C6_CO6.1@2597.48,3909.52 ; IC2_CO7.11@2485.47,4590 2549.43,4590 2568.96,4609.52 C6_CO7.1@2597.48,4609.52 ; C6_CO8.1@2594.57,5313.97 C6_CO8.1@2597.04,5311.49 ; C6_CO1.1@2595,412 C6_CO1.1@2597.48,409.52 ; C6_CO2.1@2595,1112 C6_CO2.1@2597.48,1109.52 ; C6_CO3.1@2595,1812 C6_CO3.1@2597.48,1809.52 ; C6_CO4.1@2595,2512 C6_CO4.1@2597.48,2509.52 ; C6_CO5.1@2595,3212 C6_CO5.1@2597.48,3209.52 ; C6_CO6.1@2595,3912 C6_CO6.1@2597.48,3909.52 ; C6_CO7.1@2595,4612 C6_CO7.1@2597.48,4609.52 ; v1(2694.57,5331.97) 2689.57,5326.97 2612.52,5326.97 C6_CO8.1@2597.04,5311.49 ; v1(2695,430) 2690,425 2612.95,425 C6_CO1.1@2597.48,409.52 ; v1(2695,1130) 2690,1125 2612.95,1125 C6_CO2.1@2597.48,1109.52 ; v1(2695,1830) 2690,1825 2612.95,1825 C6_CO3.1@2597.48,1809.52 ; v1(2695,2530) 2690,2525 2612.95,2525 C6_CO4.1@2597.48,2509.52 ; v1(2695,3230) 2690,3225 2612.95,3225 C6_CO5.1@2597.48,3209.52 ; v1(2695,3930) 2690,3925 2612.95,3925 C6_CO6.1@2597.48,3909.52 ; v1(2695,4630) 2690,4625 2612.95,4625 C6_CO7.1@2597.48,4609.52 ; v1(3399.57,5466.97) 3474.57,5466.97 C2_CO8.2@3479.57,5471.97 ; v1(3400,565) 3475,565 C2_CO1.2@3480,570 ; v1(3400,1265) 3475,1265 C2_CO2.2@3480,1270 ; v1(3400,1965) 3475,1965 C2_CO3.2@3480,1970 ; v1(3400,2665) 3475,2665 C2_CO4.2@3480,2670 ; v1(3400,3365) 3475,3365 C2_CO5.2@3480,3370 ; v1(3400,4065) 3475,4065 C2_CO6.2@3480,4070 ; v1(3400,4765) 3475,4765 C2_CO7.2@3480,4770 ; v1(3404.57,5166.97) 3415.94,5166.97 3417.17,5165.74 3438.4,5186.97 C4_CO8.2@3484.57,5186.97 ; v1(3405,265) 3416.38,265 3417.61,263.77 3438.84,285 C4_CO1.2@3485,285 ; v1(3405,965) 3416.38,965 3417.61,963.77 3438.84,985 C4_CO2.2@3485,985 ; v1(3405,1665) 3416.38,1665 3417.61,1663.77 3438.84,1685 C4_CO3.2@3485,1685 ; v1(3405,2365) 3416.38,2365 3417.61,2363.77 3438.84,2385 C4_CO4.2@3485,2385 ; v1(3405,3065) 3416.38,3065 3417.61,3063.77 3438.84,3085 C4_CO5.2@3485,3085 ; v1(3405,3765) 3416.38,3765 3417.61,3763.77 3438.84,3785 C4_CO6.2@3485,3785 ; v1(3405,4465) 3416.38,4465 3417.61,4463.77 3438.84,4485 C4_CO7.2@3485,4485 ; C4_CO8.2@3478.77,5188.2 3526.77,5188.2 ; C4_CO1.2@3479.2,286.23 3527.2,286.23 ; C4_CO2.2@3479.2,986.23 3527.2,986.23 ; C4_CO3.2@3479.2,1686.23 3527.2,1686.23 ; C4_CO4.2@3479.2,2386.23 3527.2,2386.23 ; C4_CO5.2@3479.2,3086.23 3527.2,3086.23 ; C4_CO6.2@3479.2,3786.23 3527.2,3786.23 ; C4_CO7.2@3479.2,4486.23 3527.2,4486.23 ; IC1_CO1.9@3643.54,294.98 3643.62,295.06 3680,295.06 3695,310.06 3695,439.14 3689.14,445 3647.06,445 IC1_CO1.3@3643.54,448.52
AMP_A_CO1: IC1_CO1.2 IC2_CO1.1 R17_CO1.1 | length 1804.1
  Top Layer w10: v1(2104.37,684.21) 2104.37,632.07 R17_CO1.1@2117.9,618.53 ; R17_CO1.1@2118.53,604.32 2182.85,540 IC2_CO1.1@2205,540 ; v1(3559.2,494.23) 3562.55,490.89 3592.43,490.89 3609.2,474.11 IC1_CO1.2@3643.54,474.11
  Bottom Layer w10: v1@2105,670 2455,670 2605,520 3528.41,520 3554.18,494.23 v1(3559.2,494.23)
AMP_A_CO2: IC1_CO2.2 IC2_CO2.1 R17_CO2.1 | length 1804.1
  Top Layer w10: v1(2104.37,1384.21) 2104.37,1332.07 R17_CO2.1@2117.9,1318.53 ; R17_CO2.1@2118.53,1304.32 2182.85,1240 IC2_CO2.1@2205,1240 ; v1(3559.2,1194.23) 3562.55,1190.89 3592.43,1190.89 3609.2,1174.11 IC1_CO2.2@3643.54,1174.11
  Bottom Layer w10: v1@2105,1370 2455,1370 2605,1220 3528.41,1220 3554.18,1194.23 v1(3559.2,1194.23)
AMP_A_CO3: IC1_CO3.2 IC2_CO3.1 R17_CO3.1 | length 1804.1
  Top Layer w10: v1(2104.37,2084.21) 2104.37,2032.07 R17_CO3.1@2117.9,2018.53 ; R17_CO3.1@2118.53,2004.32 2182.85,1940 IC2_CO3.1@2205,1940 ; v1(3559.2,1894.23) 3562.55,1890.89 3592.43,1890.89 3609.2,1874.11 IC1_CO3.2@3643.54,1874.11
  Bottom Layer w10: v1@2105,2070 2455,2070 2605,1920 3528.41,1920 3554.18,1894.23 v1(3559.2,1894.23)
AMP_A_CO4: IC1_CO4.2 IC2_CO4.1 R17_CO4.1 | length 1804.1
  Top Layer w10: v1(2104.37,2784.21) 2104.37,2732.07 R17_CO4.1@2117.9,2718.53 ; R17_CO4.1@2118.53,2704.32 2182.85,2640 IC2_CO4.1@2205,2640 ; v1(3559.2,2594.23) 3562.55,2590.89 3592.43,2590.89 3609.2,2574.11 IC1_CO4.2@3643.54,2574.11
  Bottom Layer w10: v1@2105,2770 2455,2770 2605,2620 3528.41,2620 3554.18,2594.23 v1(3559.2,2594.23)
AMP_A_CO5: IC1_CO5.2 IC2_CO5.1 R17_CO5.1 | length 1804.1
  Top Layer w10: v1(2104.37,3484.21) 2104.37,3432.07 R17_CO5.1@2117.9,3418.53 ; R17_CO5.1@2118.53,3404.32 2182.85,3340 IC2_CO5.1@2205,3340 ; v1(3559.2,3294.23) 3562.55,3290.89 3592.43,3290.89 3609.2,3274.11 IC1_CO5.2@3643.54,3274.11
  Bottom Layer w10: v1@2105,3470 2455,3470 2605,3320 3528.41,3320 3554.18,3294.23 v1(3559.2,3294.23)
AMP_A_CO6: IC1_CO6.2 IC2_CO6.1 R17_CO6.1 | length 1804.1
  Top Layer w10: v1(2104.37,4184.21) 2104.37,4132.07 R17_CO6.1@2117.9,4118.53 ; R17_CO6.1@2118.53,4104.32 2182.85,4040 IC2_CO6.1@2205,4040 ; v1(3559.2,3994.23) 3562.55,3990.89 3592.43,3990.89 3609.2,3974.11 IC1_CO6.2@3643.54,3974.11
  Bottom Layer w10: v1@2105,4170 2455,4170 2605,4020 3528.41,4020 3554.18,3994.23 v1(3559.2,3994.23)
AMP_A_CO7: IC1_CO7.2 IC2_CO7.1 R17_CO7.1 | length 1804.1
  Top Layer w10: v1(2104.37,4884.21) 2104.37,4832.07 R17_CO7.1@2117.9,4818.53 ; R17_CO7.1@2118.53,4804.32 2182.85,4740 IC2_CO7.1@2205,4740 ; v1(3559.2,4694.23) 3562.55,4690.89 3592.43,4690.89 3609.2,4674.11 IC1_CO7.2@3643.54,4674.11
  Bottom Layer w10: v1@2105,4870 2455,4870 2605,4720 3528.41,4720 3554.18,4694.23 v1(3559.2,4694.23)
AMP_A_CO8: IC1_CO8.2 IC2_CO8.1 R17_CO8.1 | length 1804.1
  Top Layer w10: v1(2103.94,5586.18) 2103.94,5534.04 R17_CO8.1@2117.47,5520.5 ; R17_CO8.1@2118.1,5506.29 2182.42,5441.97 IC2_CO8.1@2204.57,5441.97 ; v1(3558.77,5396.2) 3562.11,5392.86 3592,5392.86 3608.77,5376.08 IC1_CO8.2@3643.1,5376.08
  Bottom Layer w10: v1@2104.57,5571.97 2454.57,5571.97 2604.57,5421.97 3527.97,5421.97 3553.75,5396.2 v1(3558.77,5396.2)
AMP_B_CO1: IC1_CO1.5 IC2_CO1.7 R18_CO1.2 | length 1987.7
  Top Layer w10: v1(2104.37,90) R18_CO1.2@2104.37,161 2104.37,169.86 2165.73,231.22 2196.22,231.22 IC2_CO1.7@2205,240 ; v1(3560.97,402.75) 3560.68,402.75 3560.24,403.2 3593.35,403.2 3599.2,397.34 IC1_CO1.5@3643.54,397.34
  Bottom Layer w10: v1(2104.37,90) 2504.37,490 2965,490 3085,370 3325,370 3365,410 3553.72,410 v1(3560.97,402.75)
AMP_B_CO2: IC1_CO2.5 IC2_CO2.7 R18_CO2.2 | length 1987.7
  Top Layer w10: v1(2104.37,790) R18_CO2.2@2104.37,861 2104.37,869.86 2165.73,931.22 2196.22,931.22 IC2_CO2.7@2205,940 ; v1(3560.97,1102.75) 3560.68,1102.75 3560.24,1103.2 3593.35,1103.2 3599.2,1097.34 IC1_CO2.5@3643.54,1097.34
  Bottom Layer w10: v1(2104.37,790) 2504.37,1190 2965,1190 3085,1070 3325,1070 3365,1110 3553.72,1110 v1(3560.97,1102.75)
AMP_B_CO3: IC1_CO3.5 IC2_CO3.7 R18_CO3.2 | length 1987.7
  Top Layer w10: v1(2104.37,1490) R18_CO3.2@2104.37,1561 2104.37,1569.86 2165.73,1631.22 2196.22,1631.22 IC2_CO3.7@2205,1640 ; v1(3560.97,1802.75) 3560.68,1802.75 3560.24,1803.2 3593.35,1803.2 3599.2,1797.34 IC1_CO3.5@3643.54,1797.34
  Bottom Layer w10: v1(2104.37,1490) 2504.37,1890 2965,1890 3085,1770 3325,1770 3365,1810 3553.72,1810 v1(3560.97,1802.75)
AMP_B_CO4: IC1_CO4.5 IC2_CO4.7 R18_CO4.2 | length 1987.7
  Top Layer w10: v1(2104.37,2190) R18_CO4.2@2104.37,2261 2104.37,2269.86 2165.73,2331.22 2196.22,2331.22 IC2_CO4.7@2205,2340 ; v1(3560.97,2502.75) 3560.68,2502.75 3560.24,2503.2 3593.35,2503.2 3599.2,2497.34 IC1_CO4.5@3643.54,2497.34
  Bottom Layer w10: v1(2104.37,2190) 2504.37,2590 2965,2590 3085,2470 3325,2470 3365,2510 3553.72,2510 v1(3560.97,2502.75)
AMP_B_CO5: IC1_CO5.5 IC2_CO5.7 R18_CO5.2 | length 1987.7
  Top Layer w10: v1(2104.37,2890) R18_CO5.2@2104.37,2961 2104.37,2969.86 2165.73,3031.22 2196.22,3031.22 IC2_CO5.7@2205,3040 ; v1(3560.97,3202.75) 3560.68,3202.75 3560.24,3203.2 3593.35,3203.2 3599.2,3197.34 IC1_CO5.5@3643.54,3197.34
  Bottom Layer w10: v1(2104.37,2890) 2504.37,3290 2965,3290 3085,3170 3325,3170 3365,3210 3553.72,3210 v1(3560.97,3202.75)
AMP_B_CO6: IC1_CO6.5 IC2_CO6.7 R18_CO6.2 | length 1987.7
  Top Layer w10: v1(2104.37,3590) R18_CO6.2@2104.37,3661 2104.37,3669.86 2165.73,3731.22 2196.22,3731.22 IC2_CO6.7@2205,3740 ; v1(3560.97,3902.75) 3560.68,3902.75 3560.24,3903.2 3593.35,3903.2 3599.2,3897.34 IC1_CO6.5@3643.54,3897.34
  Bottom Layer w10: v1(2104.37,3590) 2504.37,3990 2965,3990 3085,3870 3325,3870 3365,3910 3553.72,3910 v1(3560.97,3902.75)
AMP_B_CO7: IC1_CO7.5 IC2_CO7.7 R18_CO7.2 | length 1987.7
  Top Layer w10: v1(2104.37,4290) R18_CO7.2@2104.37,4361 2104.37,4369.86 2165.73,4431.22 2196.22,4431.22 IC2_CO7.7@2205,4440 ; v1(3560.97,4602.75) 3560.68,4602.75 3560.24,4603.2 3593.35,4603.2 3599.2,4597.34 IC1_CO7.5@3643.54,4597.34
  Bottom Layer w10: v1(2104.37,4290) 2504.37,4690 2965,4690 3085,4570 3325,4570 3365,4610 3553.72,4610 v1(3560.97,4602.75)
AMP_B_CO8: IC1_CO8.5 IC2_CO8.7 R18_CO8.2 | length 1987.7
  Top Layer w10: v1(2103.94,4991.97) R18_CO8.2@2103.94,5062.97 2103.94,5071.83 2165.3,5133.19 2195.79,5133.19 IC2_CO8.7@2204.57,5141.97 ; v1(3560.54,5304.72) 3560.25,5304.72 3559.8,5305.17 3592.91,5305.17 3598.77,5299.31 IC1_CO8.5@3643.1,5299.31
  Bottom Layer w10: v1(2103.94,4991.97) 2503.94,5391.97 2964.57,5391.97 3084.57,5271.97 3324.57,5271.97 3364.57,5311.97 3553.28,5311.97 v1(3560.54,5304.72)
AMP_C_CO1: IC1_CO1.8 IC2_CO1.8 R19_CO1.1 | length 1409.3
  Top Layer w10: IC2_CO1.8@2485.47,240 2494.25,231.22 2515.04,231.22 R19_CO1.1@2596.26,150 ; R19_CO1.1@2585.63,150 2585.63,141.14 2599.33,127.44 2608.19,127.44 2630.63,105 2681.19,105 2694.07,117.88 2694.07,154.07 2835,295 v1(2835,305) ; v1(3560.76,313.71) 3592.35,313.71 3599.2,320.57 IC1_CO1.8@3643.54,320.57
  Bottom Layer w10: v1(2835,305) 3035,305 3080,350 3330,350 3370,390 3484.47,390 v1(3560.76,313.71)
AMP_C_CO2: IC1_CO2.8 IC2_CO2.8 R19_CO2.1 | length 1409.3
  Top Layer w10: IC2_CO2.8@2485.47,940 2494.25,931.22 2515.04,931.22 R19_CO2.1@2596.26,850 ; R19_CO2.1@2585.63,850 2585.63,841.14 2599.33,827.44 2608.19,827.44 2630.63,805 2681.19,805 2694.07,817.88 2694.07,854.07 2835,995 v1(2835,1005) ; v1(3560.76,1013.71) 3592.35,1013.71 3599.2,1020.57 IC1_CO2.8@3643.54,1020.57
  Bottom Layer w10: v1(2835,1005) 3035,1005 3080,1050 3330,1050 3370,1090 3484.47,1090 v1(3560.76,1013.71)
AMP_C_CO3: IC1_CO3.8 IC2_CO3.8 R19_CO3.1 | length 1409.3
  Top Layer w10: IC2_CO3.8@2485.47,1640 2494.25,1631.22 2515.04,1631.22 R19_CO3.1@2596.26,1550 ; R19_CO3.1@2585.63,1550 2585.63,1541.14 2599.33,1527.44 2608.19,1527.44 2630.63,1505 2681.19,1505 2694.07,1517.88 2694.07,1554.07 2835,1695 v1(2835,1705) ; v1(3560.76,1713.71) 3592.35,1713.71 3599.2,1720.57 IC1_CO3.8@3643.54,1720.57
  Bottom Layer w10: v1(2835,1705) 3035,1705 3080,1750 3330,1750 3370,1790 3484.47,1790 v1(3560.76,1713.71)
AMP_C_CO4: IC1_CO4.8 IC2_CO4.8 R19_CO4.1 | length 1409.3
  Top Layer w10: IC2_CO4.8@2485.47,2340 2494.25,2331.22 2515.04,2331.22 R19_CO4.1@2596.26,2250 ; R19_CO4.1@2585.63,2250 2585.63,2241.14 2599.33,2227.44 2608.19,2227.44 2630.63,2205 2681.19,2205 2694.07,2217.88 2694.07,2254.07 2835,2395 v1(2835,2405) ; v1(3560.76,2413.71) 3592.35,2413.71 3599.2,2420.57 IC1_CO4.8@3643.54,2420.57
  Bottom Layer w10: v1(2835,2405) 3035,2405 3080,2450 3330,2450 3370,2490 3484.47,2490 v1(3560.76,2413.71)
AMP_C_CO5: IC1_CO5.8 IC2_CO5.8 R19_CO5.1 | length 1409.3
  Top Layer w10: IC2_CO5.8@2485.47,3040 2494.25,3031.22 2515.04,3031.22 R19_CO5.1@2596.26,2950 ; R19_CO5.1@2585.63,2950 2585.63,2941.14 2599.33,2927.44 2608.19,2927.44 2630.63,2905 2681.19,2905 2694.07,2917.88 2694.07,2954.07 2835,3095 v1(2835,3105) ; v1(3560.76,3113.71) 3592.35,3113.71 3599.2,3120.57 IC1_CO5.8@3643.54,3120.57
  Bottom Layer w10: v1(2835,3105) 3035,3105 3080,3150 3330,3150 3370,3190 3484.47,3190 v1(3560.76,3113.71)
AMP_C_CO6: IC1_CO6.8 IC2_CO6.8 R19_CO6.1 | length 1409.3
  Top Layer w10: IC2_CO6.8@2485.47,3740 2494.25,3731.22 2515.04,3731.22 R19_CO6.1@2596.26,3650 ; R19_CO6.1@2585.63,3650 2585.63,3641.14 2599.33,3627.44 2608.19,3627.44 2630.63,3605 2681.19,3605 2694.07,3617.88 2694.07,3654.07 2835,3795 v1(2835,3805) ; v1(3560.76,3813.71) 3592.35,3813.71 3599.2,3820.57 IC1_CO6.8@3643.54,3820.57
  Bottom Layer w10: v1(2835,3805) 3035,3805 3080,3850 3330,3850 3370,3890 3484.47,3890 v1(3560.76,3813.71)
AMP_C_CO7: IC1_CO7.8 IC2_CO7.8 R19_CO7.1 | length 1409.3
  Top Layer w10: IC2_CO7.8@2485.47,4440 2494.25,4431.22 2515.04,4431.22 R19_CO7.1@2596.26,4350 ; R19_CO7.1@2585.63,4350 2585.63,4341.14 2599.33,4327.44 2608.19,4327.44 2630.63,4305 2681.19,4305 2694.07,4317.88 2694.07,4354.07 2835,4495 v1(2835,4505) ; v1(3560.76,4513.71) 3592.35,4513.71 3599.2,4520.57 IC1_CO7.8@3643.54,4520.57
  Bottom Layer w10: v1(2835,4505) 3035,4505 3080,4550 3330,4550 3370,4590 3484.47,4590 v1(3560.76,4513.71)
AMP_C_CO8: IC1_CO8.8 IC2_CO8.8 R19_CO8.1 | length 1409.3
  Top Layer w10: IC2_CO8.8@2485.04,5141.97 2493.82,5133.19 2514.61,5133.19 R19_CO8.1@2595.83,5051.97 ; R19_CO8.1@2585.2,5051.97 2585.2,5043.11 2598.9,5029.41 2607.76,5029.41 2630.2,5006.97 2680.75,5006.97 2693.64,5019.85 2693.64,5056.04 2834.57,5196.97 v1(2834.57,5206.97) ; v1(3560.33,5215.68) 3591.91,5215.68 3598.77,5222.54 IC1_CO8.8@3643.1,5222.54
  Bottom Layer w10: v1(2834.57,5206.97) 3034.57,5206.97 3079.57,5251.97 3329.57,5251.97 3369.57,5291.97 3484.04,5291.97 v1(3560.33,5215.68)
AMP_D_CO1: IC1_CO1.11 IC2_CO1.14 R20_CO1.1 | length 1797.3
  Top Layer w10: IC2_CO1.14@2485.47,540 2516.42,540 2576.42,600 R20_CO1.1@2585.63,590.79 ; R20_CO1.1@2585.63,605 2585.63,705.21 2615.42,735 2720,735 2875,580 2875,288.43 2835,248.43 v1(2835,215) ; v1(3559.2,224.23) 3562.49,227.51 3592.49,227.51 3609.2,244.23 3643.1,244.23 IC1_CO1.11@3643.54,243.8
  Bottom Layer w10: v1(2835,215) 2839.61,219.61 3554.59,219.61 v1(3559.2,224.23)
AMP_D_CO2: IC1_CO2.11 IC2_CO2.14 R20_CO2.1 | length 1797.3
  Top Layer w10: IC2_CO2.14@2485.47,1240 2516.42,1240 2576.42,1300 R20_CO2.1@2585.63,1290.79 ; R20_CO2.1@2585.63,1305 2585.63,1405.21 2615.42,1435 2720,1435 2875,1280 2875,988.43 2835,948.43 v1(2835,915) ; v1(3559.2,924.23) 3562.49,927.51 3592.49,927.51 3609.2,944.23 3643.1,944.23 IC1_CO2.11@3643.54,943.8
  Bottom Layer w10: v1(2835,915) 2839.61,919.61 3554.59,919.61 v1(3559.2,924.23)
AMP_D_CO3: IC1_CO3.11 IC2_CO3.14 R20_CO3.1 | length 1797.3
  Top Layer w10: IC2_CO3.14@2485.47,1940 2516.42,1940 2576.42,2000 R20_CO3.1@2585.63,1990.79 ; R20_CO3.1@2585.63,2005 2585.63,2105.21 2615.42,2135 2720,2135 2875,1980 2875,1688.43 2835,1648.43 v1(2835,1615) ; v1(3559.2,1624.23) 3562.49,1627.51 3592.49,1627.51 3609.2,1644.23 3643.1,1644.23 IC1_CO3.11@3643.54,1643.8
  Bottom Layer w10: v1(2835,1615) 2839.61,1619.61 3554.59,1619.61 v1(3559.2,1624.23)
AMP_D_CO4: IC1_CO4.11 IC2_CO4.14 R20_CO4.1 | length 1797.3
  Top Layer w10: IC2_CO4.14@2485.47,2640 2516.42,2640 2576.42,2700 R20_CO4.1@2585.63,2690.79 ; R20_CO4.1@2585.63,2705 2585.63,2805.21 2615.42,2835 2720,2835 2875,2680 2875,2388.43 2835,2348.43 v1(2835,2315) ; v1(3559.2,2324.23) 3562.49,2327.51 3592.49,2327.51 3609.2,2344.23 3643.1,2344.23 IC1_CO4.11@3643.54,2343.8
  Bottom Layer w10: v1(2835,2315) 2839.61,2319.61 3554.59,2319.61 v1(3559.2,2324.23)
AMP_D_CO5: IC1_CO5.11 IC2_CO5.14 R20_CO5.1 | length 1797.3
  Top Layer w10: IC2_CO5.14@2485.47,3340 2516.42,3340 2576.42,3400 R20_CO5.1@2585.63,3390.79 ; R20_CO5.1@2585.63,3405 2585.63,3505.21 2615.42,3535 2720,3535 2875,3380 2875,3088.43 2835,3048.43 v1(2835,3015) ; v1(3559.2,3024.23) 3562.49,3027.51 3592.49,3027.51 3609.2,3044.23 3643.1,3044.23 IC1_CO5.11@3643.54,3043.8
  Bottom Layer w10: v1(2835,3015) 2839.61,3019.61 3554.59,3019.61 v1(3559.2,3024.23)
AMP_D_CO6: IC1_CO6.11 IC2_CO6.14 R20_CO6.1 | length 1797.3
  Top Layer w10: IC2_CO6.14@2485.47,4040 2516.42,4040 2576.42,4100 R20_CO6.1@2585.63,4090.79 ; R20_CO6.1@2585.63,4105 2585.63,4205.21 2615.42,4235 2720,4235 2875,4080 2875,3788.43 2835,3748.43 v1(2835,3715) ; v1(3559.2,3724.23) 3562.49,3727.51 3592.49,3727.51 3609.2,3744.23 3643.1,3744.23 IC1_CO6.11@3643.54,3743.8
  Bottom Layer w10: v1(2835,3715) 2839.61,3719.61 3554.59,3719.61 v1(3559.2,3724.23)
AMP_D_CO7: IC1_CO7.11 IC2_CO7.14 R20_CO7.1 | length 1797.3
  Top Layer w10: IC2_CO7.14@2485.47,4740 2516.42,4740 2576.42,4800 R20_CO7.1@2585.63,4790.79 ; R20_CO7.1@2585.63,4805 2585.63,4905.21 2615.42,4935 2720,4935 2875,4780 2875,4488.43 2835,4448.43 v1(2835,4415) ; v1(3559.2,4424.23) 3562.49,4427.51 3592.49,4427.51 3609.2,4444.23 3643.1,4444.23 IC1_CO7.11@3643.54,4443.8
  Bottom Layer w10: v1(2835,4415) 2839.61,4419.61 3554.59,4419.61 v1(3559.2,4424.23)
AMP_D_CO8: IC1_CO8.11 IC2_CO8.14 R20_CO8.1 | length 1797.3
  Top Layer w10: IC2_CO8.14@2485.04,5441.97 2515.98,5441.97 2575.98,5501.97 R20_CO8.1@2585.2,5492.76 ; R20_CO8.1@2585.2,5506.97 2585.2,5607.18 2614.98,5636.97 2719.57,5636.97 2874.57,5481.97 2874.57,5190.4 2834.57,5150.4 v1(2834.57,5116.97) ; v1(3558.77,5126.2) 3562.06,5129.48 3592.06,5129.48 3608.77,5146.2 3642.67,5146.2 IC1_CO8.11@3643.1,5145.77
  Bottom Layer w10: v1(2834.57,5116.97) 2839.18,5121.58 3554.16,5121.58 v1(3558.77,5126.2)